# Altium PCB PCB_PDB.PcbDoc
Units mm, origin at the board's own origin, x right, y up, seen from the top; angles counter-clockwise.
Board outline 100 x 100 mm, 2 copper layers (Top Layer, Bottom Layer); 56 components, 10 nets, 150 pads, 1 vias.
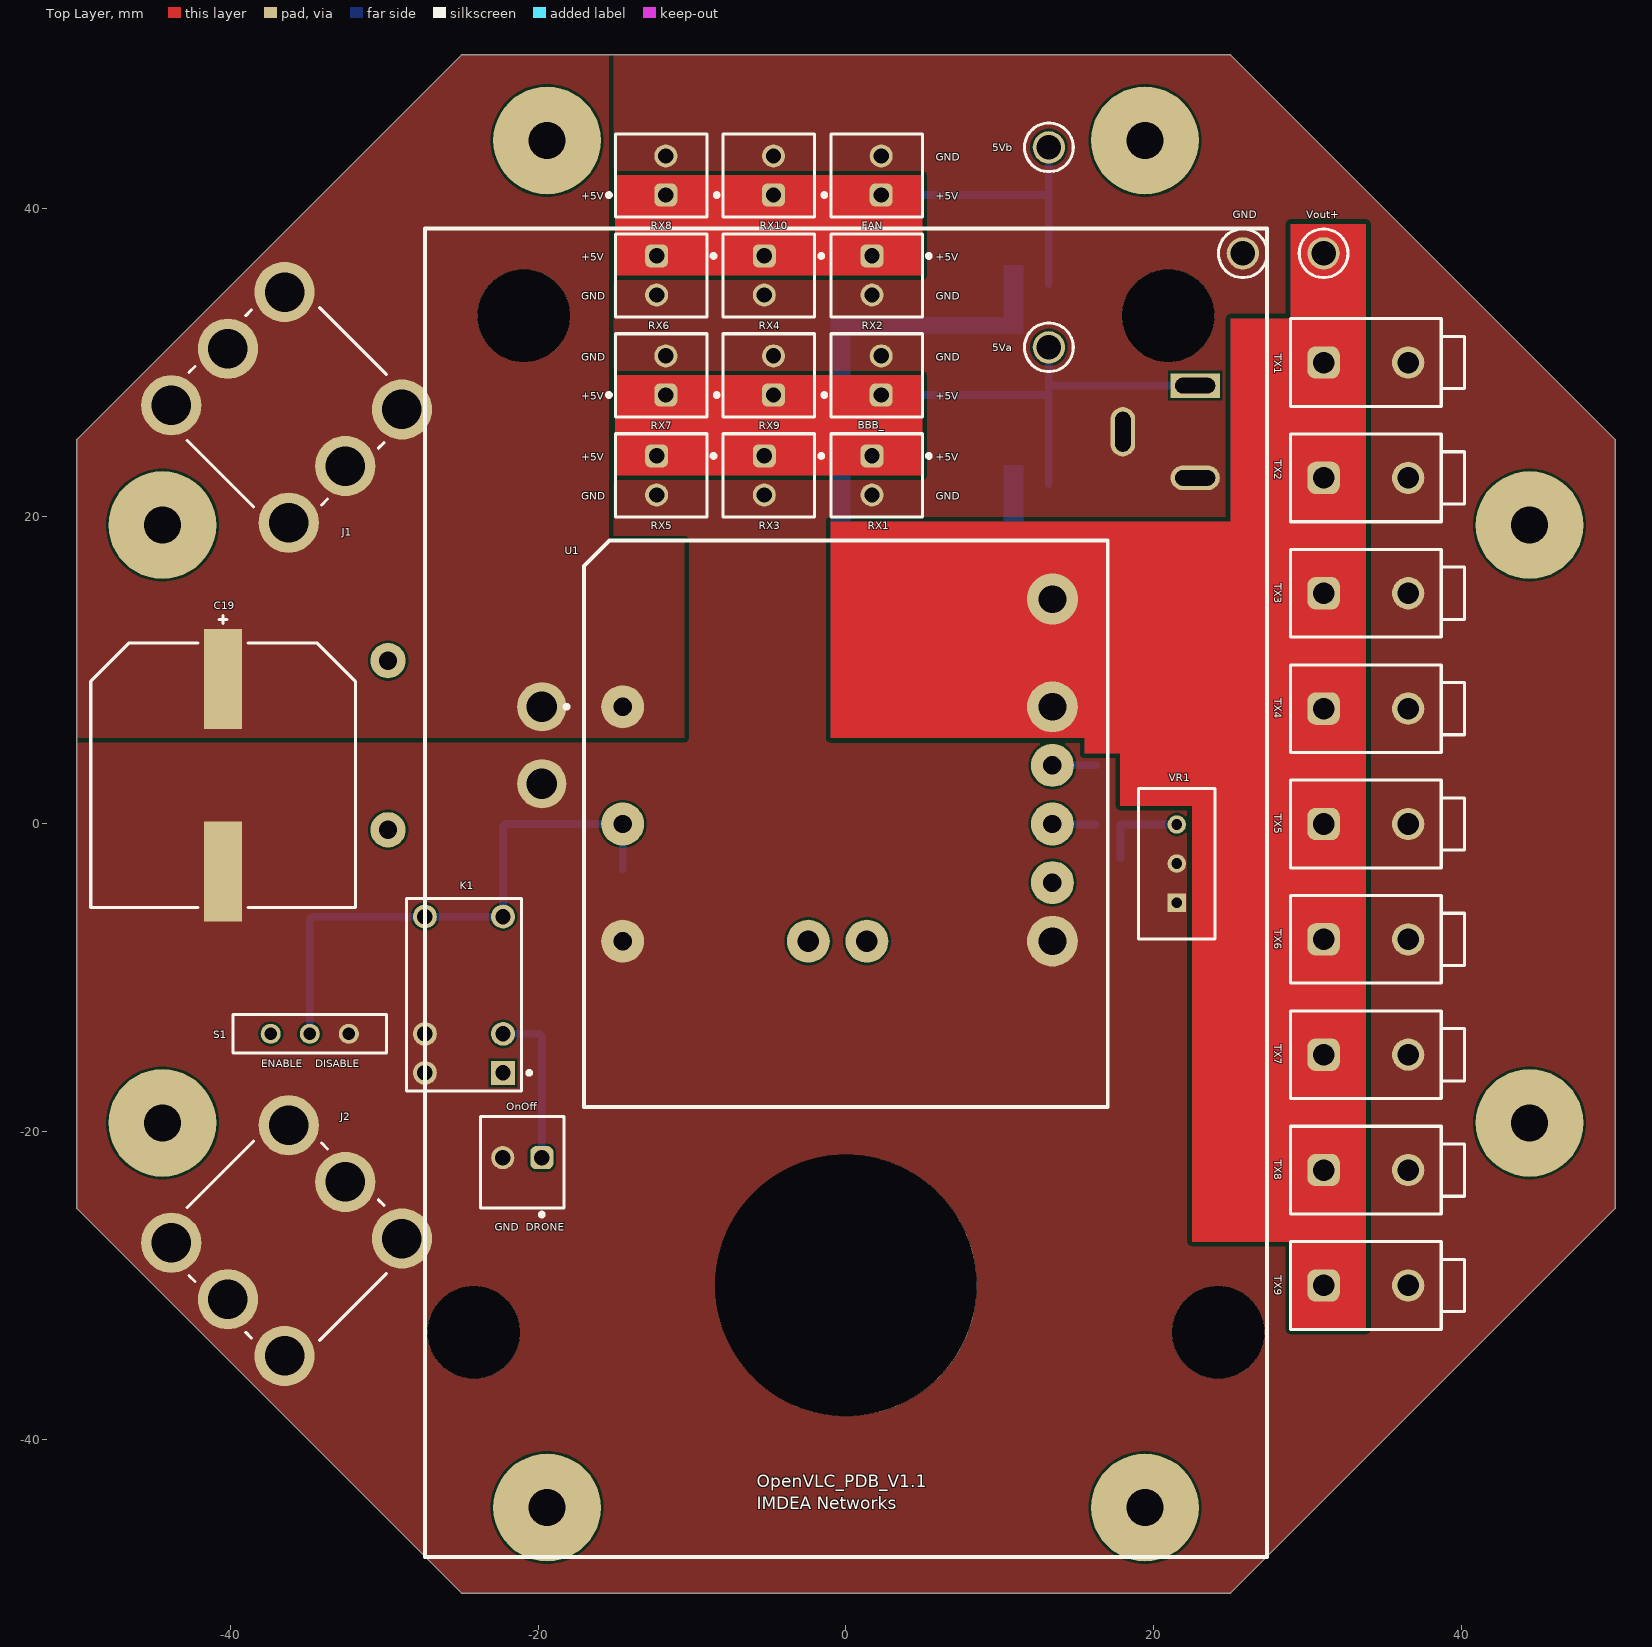
[diagram p0: Top Layer view]
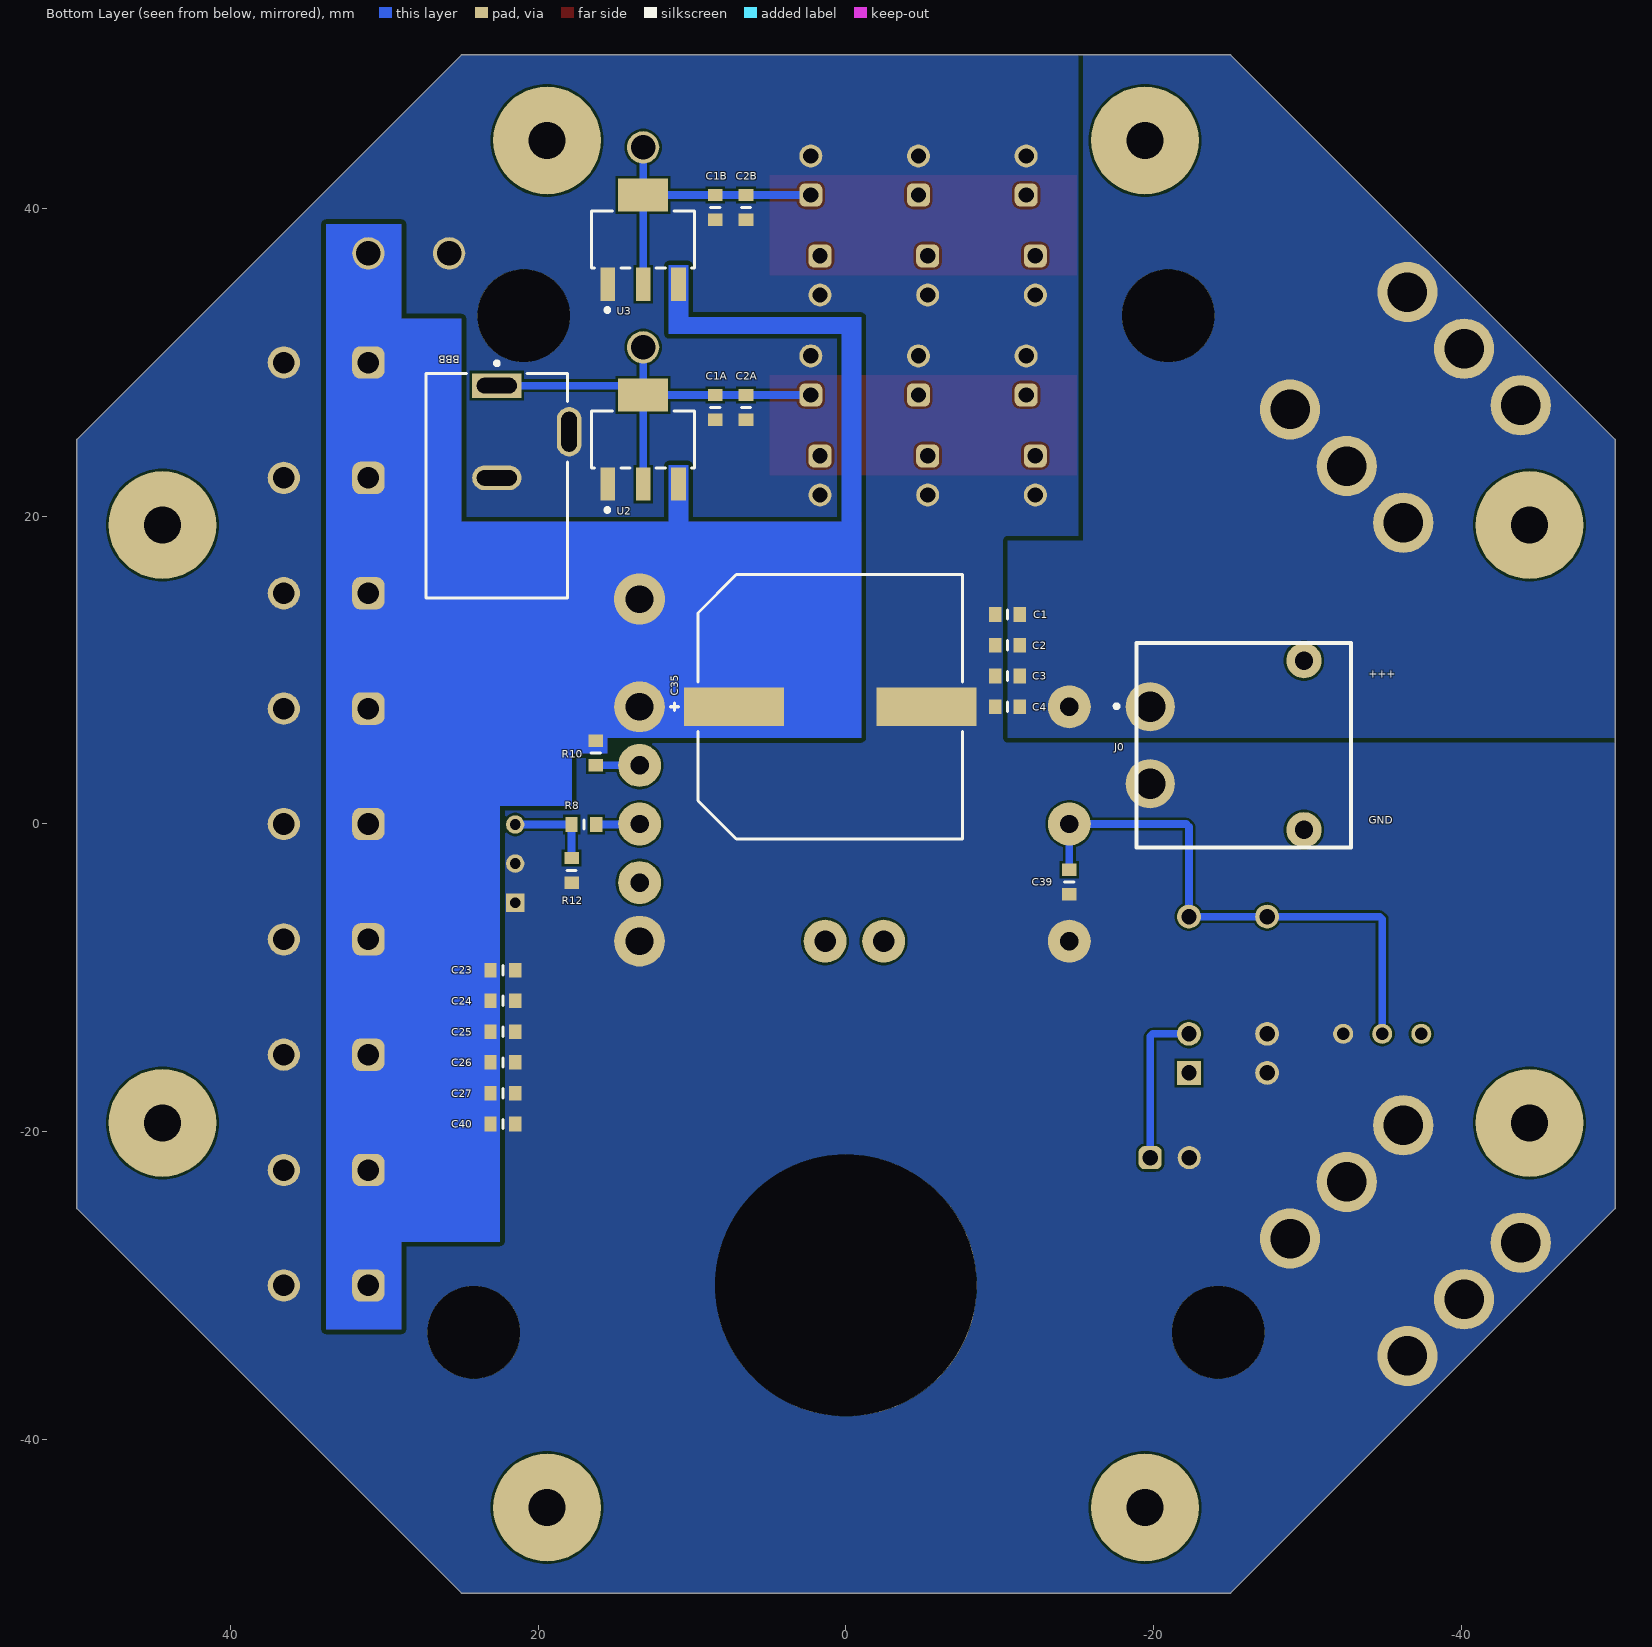
[diagram p1: Bottom Layer view, seen from below]
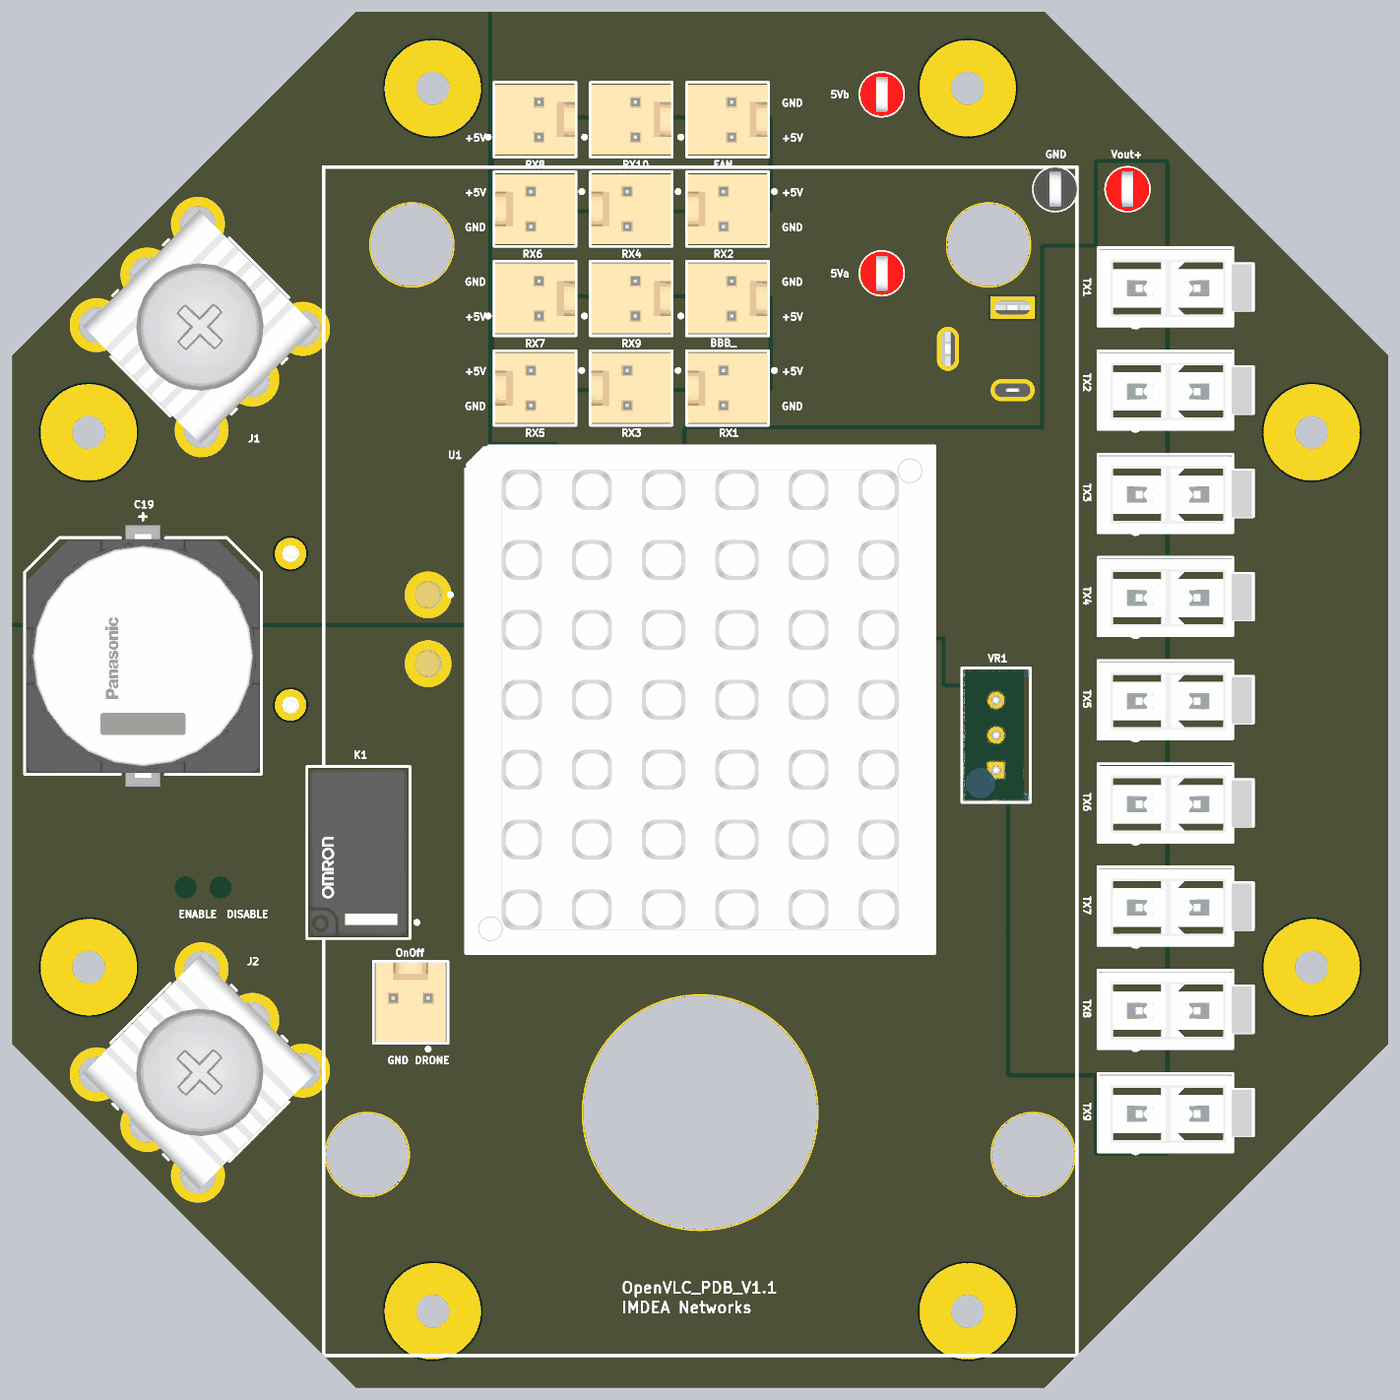
[diagram p2: 3D render of the assembled board from above, using the file's embedded part models]

## Layer stack, top to bottom
Top Solder: solder mask 0.0102, Solder Resist, Dk 3.5
Top Layer: signal copper 0.07
Dielectric1: dielectric 0.32, FR-4, Dk 4.8
Bottom Layer: signal copper 0.07
Bottom Solder: solder mask 0.0102, Solder Resist, Dk 3.5

## Board outline
-50,-25 -25,-50 25,-50 50,-25 50,25 25,50 -25,50 -50,25

## Design rules (kind name [scope] priority, off if disabled: settings)
Clearance Clearance_1 [(InNet('GND') AND InComponent('DC-DC'))] p1: gap=0.5 ignorepadtopadclearanceinfootprint=FALSE except(0: Arc-Hole Track-Hole SMDPad-Hole THPad-Hole Via-Hole Fill-Hole Poly-Hole Region-Hole Text-Hole)
Clearance [All] p2: gap=0.15 ignorepadtopadclearanceinfootprint=FALSE except(0: Arc-Hole Track-Hole SMDPad-Hole THPad-Hole Via-Hole Fill-Hole Poly-Hole Region-Hole Text-Hole; 0.3: Fill-Fill Fill-Poly Fill-Region Poly-Poly Poly-Region Region-Region)
DiffPairsRouting [All] p1: maxlimit=0.3 minlimit=0.3 mostfreqgap=0.3 toplayer_minwidth=0.381 toplayer_maxwidth=0.381 toplayer_prefwidth=0.381 bottomlayer_minwidth=0.381 bottomlayer_maxwidth=0.381 bottomlayer_prefwidth=0.381 maxuncoupledlength=12.7
Height [All] p1: minheight=0 maxheight=40 prefheight=12.7
HoleSize [All] p1: absolutevalues=TRUE maxlimit=2.54 minlimit=0.25 maxpercent=80.000 minpercent=20.000
MinimumSolderMaskSliver [All] p1: minsoldermaskwidth=0.15
PlaneClearance [All] p1: clearance=0.5
PlaneConnect [All] p1: planeconnectstyle=Direct reliefexpansion=0.508 reliefentries=4 reliefconductorwidth=0.254 reliefairgap=0.254
PolygonConnect PolygonConnect_1 [IsVia & InNet('GND')] p1: connectstyle=Direct reliefconductorwidth=0.254 reliefentries=4 polygonreliefangle="90 Angle" airgapwidth=0
PolygonConnect [All] p2: connectstyle=Direct reliefconductorwidth=0.254 reliefentries=4 polygonreliefangle="90 Angle" airgapwidth=0.254
RoutingVias [All] p1: holewidth=0.711 width=1.27 viastyle="Through Hole" minholewidth=25 minwidth=0.55 maxholewidth=0.711 maxwidth=1.27
SMDNeckDown [All] p1: percent=80.000
SilkToSilkClearance [All] p1: silktosilkclearance=0.15
SilkToSolderMaskClearance [IsPad] p1: minsilkscreentomaskgap=0.15 clearancetoexposedcopper=TRUE
SolderMaskExpansion [All] p1: expansion=0.102 istentingtop=FALSE
SupplyNets "Schematic Supply Nets_1" [InNet('+13.8V')] p1: voltage=0.000
SupplyNets "Schematic Supply Nets" [InNet('GND')] p2: voltage=0.000
Width [All] p1: maxlimit=0.5 minlimit=0.15 preferedwidth=0.3 minimp=50.000000 maximp=50.000000 favimp=50.000000
22 further rules are at their usual default settings.

## Components (designator, comment, footprint, x,y, rotation, side; value= is the part's Value field where it differs from the comment)
5Va "5010" KSTN-5010_V 13.188,30.989 r90 top
5Vb "5010" KSTN-5010_V 13.188,43.989 r90 top
BBB "PJ-102A" FP-PJ-102A-MFG 22.7,22 r0 bottom
BBB_ "61900211121" 61900211121 1.989,29.159 r270 top
C1 "GRM188R6YA106MA73D" RESC1608X55N -10.5,13.62 r180 bottom value=10uF
C1A "GRM188R6YA106MA73D" RESC1608X55N 8.5,27.089 r90 bottom value=10uF
C1B "GRM188R6YA106MA73D" RESC1608X55N 8.5,40.089 r90 bottom value=10uF
C2 "GRM188R6YA106MA73D" RESC1608X55N -10.5,11.62 r180 bottom value=10uF
C2A "GCM188R71H104KA57J" RESC1608X55N 6.5,27.089 r270 bottom value=100nF
C2B "GCM188R71H104KA57J" RESC1608X55N 6.5,40.089 r270 bottom value=100nF
C3 "GRM188R6YA106MA73D" RESC1608X55N -10.5,9.62 r180 bottom value=10uF
C4 "GCM188R71H104KA57J" RESC1608X55N -10.5,7.62 r0 bottom value=100nF
C19 "EEE-FK1H102AV" CAP-17x17 -40.5,3.15 r0 top
C23 "GRM188R6YA106MA73D" RESC1608X55N 22.305,-9.5 r0 bottom value=10uF
C24 "GRM188R6YA106MA73D" RESC1608X55N 22.305,-11.5 r0 bottom value=10uF
C25 "GRM188R6YA106MA73D" RESC1608X55N 22.305,-13.5 r0 bottom value=10uF
C26 "GRM188R6YA106MA73D" RESC1608X55N 22.305,-15.5 r0 bottom value=10uF
C27 "GRM188R6YA106MA73D" RESC1608X55N 22.305,-17.5 r0 bottom value=10uF
C35 "EEE-FK1H102AV" CAP-17x17 1,7.62 r90 bottom
C39 "GCM188R71H104KA57J" RESC1608X55N -14.52,-3.777 r270 bottom value=100nF
C40 "GCM188R71H104KA57J" RESC1608X55N 22.305,-19.5 r0 bottom value=100nF
FAN "61900211121" 61900211121 1.989,42.159 r270 top
GND "5011" KSTN-5011_V 25.8,37.1 r90 top
J0 "XT30PW-M" XT30-Footprint-1 -25.849,5.12 r270 bottom
J1 "8196" FP-8196-MFG -36.365,27.085 r45 top
J2 "8196" FP-8196-MFG -36.365,-27.085 r135 top
K1 "G5V-13 DC5" FP-G5V-13_DC5-MFG -24.835,-11.1 r90 top
OnOff "61900211121" 61900211121 -21.044,-21.991 r0 top
R8 "RN73R1JTTD53R0B25" RESC1608X55N 17.041,-0.034 r0 bottom value=53
R10 "RMCF0603ZT0R00" RESC1608X55N 16.27,4.61 r270 bottom value=0
R12 "RK73H1JTTD2001D" RESC1608X55N 17.841,-3.01 r90 bottom value=2k
RX1 "61900211121" 61900211121 1.989,22.659 r90 top
RX2 "61900211121" 61900211121 1.989,35.659 r90 top
RX3 "61900211121" 61900211121 -5.011,22.659 r90 top
RX4 "61900211121" 61900211121 -5.011,35.659 r90 top
RX5 "61900211121" 61900211121 -12.011,22.659 r90 top
RX6 "61900211121" 61900211121 -12.011,35.659 r90 top
RX7 "61900211121" 61900211121 -12.011,29.159 r270 top
RX8 "61900211121" 61900211121 -12.011,42.159 r270 top
RX9 "61900211121" 61900211121 -5.011,29.159 r270 top
RX10 "61900211121" 61900211121 -5.011,42.159 r270 top
S1 "450301014042" 450301014042 -1304.859,-1283.64 r180 top
TX1 "64900221122" 64900221122 33.8,30 r270 top
TX2 "64900221122" 64900221122 33.8,22.5 r270 top
TX3 "64900221122" 64900221122 33.8,15 r270 top
TX4 "64900221122" 64900221122 33.8,7.5 r270 top
TX5 "64900221122" 64900221122 33.8,0 r270 top
TX6 "64900221122" 64900221122 33.8,-7.5 r270 top
TX7 "64900221122" 64900221122 33.8,-15 r270 top
TX8 "64900221122" 64900221122 33.8,-22.5 r270 top
TX9 "64900221122" 64900221122 33.8,-30 r270 top
U1 "iC7" "New footprint 1" 0,0 r0 top
U2 "TLV76150DCYR" FP-DCY0004A-MFG 13.188,24.989 r90 bottom
U3 "TLV76150DCYR" FP-DCY0004A-MFG 13.188,37.989 r90 bottom
Vout+ "5010" KSTN-5010_V 31.05,37.1 r90 top
VR1 "3296W-1-503LF" FP-3296W-MFG 21.5,-2.574 r0 top

## Footprints (in the part's own frame and the unit in brackets; to place one, negate y for a bottom-side part, rotate by r counter-clockwise, add the part's x,y. Pads: shape width x height; smd on the part's side, far side on the other; paste and mask are expansions set on the pad)
61900211121 [mm] "2.54mm Male Locking Header, 2p"
  rrect50% 1.5x1.5 hole 1: 1(1.27,0.3)
  round 1.5 hole 1: 2(-1.27,0.3)
  silkscreen extent -2.71,-3.52 2.71,2.98, body extent -2.54,-2.9 2.54,2.9, height 11.53
64900221122 [mm] "4.20mm Male Dual Row Vertical Header, 2p"
  rrect50% 2.1x2.1 hole 1.4: 1(0,-2.75)
  round 2.1 hole 1.4: 2(0,2.75)
  silkscreen extent -2.85,-4.9 2.85,6.4, body extent -2.7,-4.8 3.1,6.3, height 12.85
450301014042 [mm] "THT Mini Slide Switch, body 10x2.5mm"
  round 1.3 hole 0.8: COM(-1270,-1270) L1(-1267.46,-1270) L2(-1272.54,-1270)
  silkscreen extent -1275,-1271.25 -1265,-1268.75, body extent -1275,-1271.25 -1265,-1268.75, height 6.43
CAP-17x17 [mm]
  rect 2.5x6.5 smd paste+0 mask+0: 1(0,6.277) 2(0,-6.223)
  silkscreen extent -8.6,-8.57 8.6,10.4, body extent -8.5,-8.82 8.5,8.88, height 17
FP-3296W-MFG [mm]
  rect 1.2x1.2 hole 0.7 paste-2539.97 mask+0: 1(0.005,-2.54)
  round 1.2 hole 0.7 paste-2539.97 mask+0: 2(0.005,0) 3(0.005,2.54)
  silkscreen extent -2.48,-4.89 2.48,4.89, body extent -2.58,-4.99 2.58,4.99, height 0.25
FP-8196-MFG [mm]
  round 3.92 hole 2.57 paste-2539.97 mask+0: 1(-5.207,5.398) 1(-5.207,-5.398) 1(0,5.398) 1(0,-5.398) 1(5.207,5.398) 1(5.207,-5.398)
  silkscreen extent -6.1,-6.1 6.1,6.1, body extent -7.27,-7.46 7.27,7.46, height 0.25
FP-DCY0004A-MFG [mm]
  rect 2.15x0.95 smd paste+0 mask+0: 1(-2.9,2.3) 2(-2.9,0) 3(-2.9,-2.3)
  rect 2.15x3.25 smd paste+0 mask+0: 4(2.9,0)
  silkscreen extent -4.7,-3.35 1.85,3.35, body extent -3.5,-3.25 3.5,3.25, height 1.8
FP-G5V-13_DC5-MFG [mm]
  rect 1.55x1.55 hole 1 paste-2539.97 mask+0: 1(-5.08,-2.54)
  round 1.55 hole 1 paste-2539.97 mask+0: 2(-2.54,-2.54) 5(5.08,-2.54) 6(5.08,2.54) 9(-2.54,2.54) 10(-5.08,2.54)
  silkscreen extent -6.25,-4.37 6.25,3.75, body extent -6.35,-3.85 6.35,3.85, height 0.25
FP-PJ-102A-MFG [mm]
  rect 3.2x1.6 hole 1 slot 2.6 at 0 deg paste-2539.97 mask+0: 1(0,-6.5)
  rrect100% 3.2x1.6 hole 1 slot 2.6 at 0 deg paste-2539.97 mask+0: 2(0,-0.5)
  rrect100% 1.6x3.2 hole 2.6 slot 1 at 0 deg paste-2539.97 mask+0: 3(-4.7,-3.5)
  silkscreen extent -4.6,-8.07 4.6,7.3, body extent -4.9,-7.2 4.5,7.2, height 11.2
KSTN-5010_V [mm] "Test Point, Dia 3.17mm"
  round 2.1 hole 1.6: 1(0,0)
  silkscreen extent -1.58,-1.59 1.58,1.59, body extent -1.59,-1.59 1.59,1.59, height 8.13
KSTN-5011_V [mm] "Test Point, Dia 3.17mm"
  round 2.1 hole 1.6: 1(0,0)
  silkscreen extent -1.58,-1.59 1.58,1.59, body extent -1.59,-1.59 1.59,1.59, height 8.13
"New footprint 1" [mil]
  round 110 hole 47.24: 1(-571.65,300) 2(-571.65,0) 3(-571.65,-300) 5(528.35,-150) 6(528.35,0) 7(528.35,150)
  round 130 hole 70.87: 4(528.35,-300) 8(528.35,300)
  round 110 hole 55: 9(-96.46,-300) 10(53.54,-300)
  silkscreen extent -720,-725 670,725, body extent -670,-725 670,725, height 1056
RESC1608X55N [mm]
  rect 0.8x0.95 smd: 1(-0.8,0) 2(0.8,0)
  silkscreen extent 0,-0.3 0,0.3
XT30-Footprint-1 [mm]
  round 3.2 hole 2: 1(-2.5,-6.075) 2(2.5,-6.075)
  round 2.3 hole 1.2: 3(5.5,3.925) 4(-5.5,3.925)
  silkscreen extent -6.65,-8.38 6.65,6.98, body extent -6.65,-6.98 6.65,6.98, height 5.5

## Part data
5Va 5Vb Vout+: library part CMP-1672-00002-4, "Test Point, Red, Through Hole, RoHS, Bulk", Colour=Red, Manufacturer=Keystone, Package Quantity=100, ComponentLink1Description="Manufacturer URL", ComponentLink1URL=http://www.keyelco.com/, ComponentLink2Description=Datasheet, ComponentLink2URL=http://www.keyelco.com/product-pdf.cfm?p=1319, Contact Material=Bronze, Contact Plating=Silver, DatasheetVersion="Rev. F, 12/2013", Height="8.12 mm", Mount="Through Hole", Mounting Technology="Through Hole", PackageDescription="1-Pin Through Hole Device, Dia 3.17 mm", PackageReference=5010, Packaging=Bulk, Pins=1, REACH SVHC="No SVHC", RoHSCompliant=true
BBB: library part CMP-12637-106234071-1, "PJ-102A 2.0 x 6.5 mm, 2.5 A, Horizontal, Through Hole, Tapered Pins, Dc Power Jack Connector", Color=Black, Current Rating=2.5A, Flammability Rating="UL94 V-0", Insulation Resistance=50MΩ, Max Operating Temperature=85°C, Min Operating Temperature=-25°C, Voltage Rating=24V, Contact Gender=Male, Contact Material="Copper, Nickel, Tin", Contact Plating=Nickel, Diameter=2.1mm, Gender=Male, Height=11.2mm, Housing Color=Black, Housing Material=Thermoplastic, Inside Diameter=2mm, Lead Free="Lead Free", Lifecycle Status=Production, Mount="Through Hole", NexarPartId=106234071, Number of Conductors=2, Number of Contacts=3, Orientation=Horizontal, Outside Diameter=6.5mm, Packaging=Bulk, RoHS=Compliant, Schedule B="8536695050, 8536695050", Shielding=No, Termination="Through Hole", Voltage Rating (DC)=24V
BBB_ FAN OnOff RX1 RX2 RX3 RX4 RX5 RX6 RX7 RX8 RX9 RX10: library part CMP-1502-00584-3, Color=Beige, Contact Resistance=20mΩ, Current Rating=3A, Flammability Rating="UL94 V-0", Insulation Resistance=1GΩ, Max Operating Temperature=105°C, Min Operating Temperature=-40°C, Operating Supply Voltage=250V, Connector Type="Male Pin", Contact Gender=Male, Contact Material=Copper, Contact Mating Length=7.493mm, Contact Plating=Tin, Fastening Type=Friction, Gender=Male, Height=11.75mm, Housing Material=Nylon, Lead Pitch=2.54mm, Length=5.08mm, Mount="Through Hole", NexarPartId=18818218, Number of Contacts=2, Number of Pins=2, Number of Positions=2, Number of Rows=1, Orientation=Vertical, Packaging=Bulk, Pitch=2.54mm, REACH SVHC=Unknown, RoHS=Compliant, Termination="Through Hole", Voltage Rating=250V, Width=5.12mm
C1 C1A C1B C2 C2A C2B C3 C4 C23 C24 C25 C26 C27 C39 C40: library part Cap, "Capacitor", LatestRevisionDate=17-Jul-2002, LatestRevisionNote="Re-released for DXP Platform.", PackageDescription="Radial Cap, Thru-Hole; 2 Leads; 0.3 in Pin Spacing", PackageReference=RAD-0.3, Published=8-Jun-2000, Publisher="Altium Limited"
C19 C35: library part CMP-001-00083-1, "CAP-17x17"
GND: library part CMP-1672-00003-4, "Test Point, Black, Through Hole, RoHS, Bulk", Colour=Black, Manufacturer=Keystone, Package Quantity=100, ComponentLink1Description="Manufacturer URL", ComponentLink1URL=http://www.keyelco.com/, ComponentLink2Description=Datasheet, ComponentLink2URL=http://www.keyelco.com/product-pdf.cfm?p=1320, Contact Material=Bronze, Contact Plating=Silver, DatasheetVersion="Rev. F, 12/2013", Height="8.12 mm", Mount="Through Hole", Mounting Technology="Through Hole", PackageDescription="1-Pin Through Hole Device, Dia 3.17 mm", PackageReference=5011, Packaging=Bulk, Pins=1, REACH SVHC="No SVHC", RoHSCompliant=true
J0: library part CMP-00002-1
J1 J2: library part CMP-00214-00036902-2, "8196 PC Screw Terminal 0.67 in. L Brass Tin Plate Stainless Steel Mounting Hole 0.045 in. T", Current Rating=30A, Connector Type="PCB, Terminal Block", Contact Material=Brass, Contact Plating=Tin, Depth=11.93mm, Gender=Female, Height=11.7602mm, Insulation=Non-Insulated, Lead Free="Lead Free", Length=11.93mm, Material=Brass, Max Current Rating=30A, Mount="Snap in, Through Hole", NexarPartId=36902, Number of Contacts=6, Number of Pins=6, Number of Ports=1, Number of Rows=2, Number of Terminals=6, Orientation=Straight, Packaging=Bulk, REACH SVHC="No SVHC", RoHS=Compliant, Terminal Material=Brass, Termination=Screw, Wire Gauge (Max)=12AWG, Wire Gauge (Min)=22AWG
K1: library part CMP-08823-000054-1, "RELAY GEN PURPOSE SPDT 1A 5VDC", Coil Current=30mA, Coil Power=150mW, Coil Resistance=167R, Coil Voltage (DC)=5V, Contact Current Rating=1A, Max Operating Temperature=70°C, Min Operating Temperature=-40°C, Package Quantity=25, Coil Type=Non-Latching, Contact Material=Gold, Mount="Through Hole", Operate Time=5ms, Packaging=Rail/Tube, Power Consumption=150mW, Relay Type="General Purpose", Release Time=5ms, Series=G5V-1, Termination="PC Pin", Throw Configuration=SPDT
R8 R10 R12: library part Res1, "Resistor", LatestRevisionDate=17-Jul-2002, LatestRevisionNote="Re-released for DXP Platform.", PackageDescription="Axial Device, Thru-Hole; 2 Leads; 0.3 in Pin Spacing", PackageReference=AXIAL-0.3, Published=8-Jun-2000, Publisher="Altium Limited"
S1: library part CMP-1466-00001-2, Color=Grey, Contact Current Rating=500mA, Contact Resistance=30mΩ, Insulation Resistance=10GΩ, Max Operating Temperature=85°C, Min Operating Temperature=-40°C, Voltage Rating=12V, Actuator Length=1.4mm, Actuator Material="Nylon, Polyamide", Contact Material=Gold, Contact Plating=Gold, Current Rating=500mA, Electrical Life=2kcycles, Height=5.9mm, Lead Free="Lead Free", Length=8.42mm, Life (Cycles)=2kcycles, Mechanical Life=2kcycles, Mount="Through Hole", NexarPartId=23825802, Orientation=Vertical, Packaging=Bulk, REACH SVHC="No SVHC", RoHS=Compliant, Switch Function=On-On, Switch Travel=1.6mm, Termination="PC Pin", Throw Configuration=SPDT, Voltage Rating (DC)=12V, Width=2.5mm
TX1 TX2 TX3 TX4 TX5 TX6 TX7 TX8 TX9: library part CMP-1502-00493-2, Color=White, Contact Resistance=10mΩ, Current Rating=9A, Flammability Rating="UL94 V-0", Insulation Resistance=1GΩ, Max Operating Temperature=105°C, Min Operating Temperature=-40°C, Operating Supply Voltage=600V, Connector Type="Male Pin, Socket", Contact Gender=Male, Contact Material=Copper, Contact Plating=Tin, Fastening Type=Ramp, Gender=Male, Height=12.8mm, Housing Material=Nylon, Lead Length=3.5mm, Lead Pitch=4.2mm, Length=5.4mm, Mount="Through Hole", NexarPartId=8917578, Number of Contacts=2, Number of Pins=2, Number of Positions=2, Number of Rows=2, Orientation=Vertical, Pitch=4.2mm, REACH SVHC=Unknown, RoHS=Compliant, Row Spacing=5.5118mm, Termination=Solder, Voltage Rating=600V, Width=5.5mm
U1: library part CMP-00000-3, "DC-DC Converters, PCB mount type, Output: 300W, wide range (8 to 24V), Non-Isolated Step-up/Step-down"
U2 U3: library part CMP-00370-134324849-1, "TLV76150DCYR 1-A 16-V high-PSRR linear voltage regulator 4-SOT-223 -40 to 125", Case/Package=SOT-223, Dropout Voltage=900mV, Manufacturer Lifecycle Status=ACTIVE, Max Junction Temperature (Tj)=125°C, Max Supply Voltage=16V, Min Operating Temperature=-40°C, Min Supply Voltage=6.5V, Nominal Supply Current=65µA, Output Current=1A, Output Voltage=5V, Accuracy=1%, Height=1.8mm, Length=6.5mm, Lifecycle Status=Production, Max Operating Temperature=125°C, NexarPartId=134324849, Number of Channels=1, Number of Outputs=1, Number of Pins=4, Thickness=1.6mm, Width=3.5mm
VR1: library part CMP-07234-000043-1, "TRIMMER 50K OHM 0.5W PC PIN TOP", Color=Blue, Insulation Resistance=1GR, Manufacturer Series=3296, Max Operating Temperature=125°C, Max Power Dissipation=500mW, Min Operating Temperature=-55°C, Package Quantity=50, Resistance=50kR, Resistance Law=Linear, Resistance Tolerance=10%, Resistor Type=Cermet, Temperature Coefficient=100ppm/°C, Actuator Orientation=Vertical, Actuator Type=SCREW, Contact Plating=Tin, Depth=4.83mm, Height=0.395inch, Lead Free="Lead Free", Length=9.53mm, Military Standard=Not, Mount=Panel, Number of Pins=3, Number of Terminals/Pins=3, Number of Turns=25, Packaging=Rail/Tube, Power Rating=500mW, Radiation Hardening=No, REACH SVHC="No SVHC", RoHS Compliant=Yes, Series=3296, Taper=Linear, Technology=CERMET, Terminal Finish=Tin, Termination=Pin, Tolerance=10%, Type=Potentiometer, Weight=0.03oz, Width=9.53mm

## Free pads (board coordinates)
  round 7 hole 2.4: H(-44.435,-19.435) H(-44.435,19.435) H(-19.435,44.435) H(-19.435,-44.435) H(19.435,-44.435) H(19.435,44.435) H(44.435,-19.435) H(44.435,19.435)
  round 6 hole 6 unplated: H(-24.195,-33.05) H(-20.955,33.05) H(20.955,33.05) H(24.195,-33.05)
  round 17 hole 17 unplated: H(0,-30)

## Via types
v1: diameter 3.302, hole 1.8, Top Layer to Bottom Layer, 1 vias

## Nets (pads, with @x,y where several pads share a name; then routed paths per layer and width w, separated by ;. In a path a pad name is that pad's centre, name@x,y a point inside that pad or via, vN(x,y) a via of type N, cw(c..) or ccw(c..) an arc to the next point about the centre after c; other vN are vias at no path point)
+13.8V: C23.2 C24.2 C25.2 C26.2 C27.2 C35.1 C40.2 R10.1 TX1.1 TX2.1 TX3.1 TX4.1 TX5.1 TX6.1 TX7.1 TX8.1 TX9.1 U1.8 U2.3 U3.3 Vout+.1 | length 5
  Bottom Layer w0.3: U1.8 16.095,7.62 16.27,7.444 R10.1
  other v1: 13.42,14.62
GND: BBB.2 BBB.3 BBB_.2 C1.1 C1A.1 C1B.1 C2.1 C2A.2 C2B.2 C3.1 C4.2 C19.2 C23.1 C24.1 C25.1 C26.1 C27.1 C35.2 C39.2 C40.1 FAN.2 GND.1 J0.2 J2.1 K1.9 K1.10 OnOff.2 R12.1 RX1.2 RX2.2 RX3.2 RX4.2 RX5.2 RX6.2 RX7.2 RX8.2 RX9.2 RX10.2 S1.L2 TX1.2 TX2.2 TX3.2 TX4.2 TX5.2 TX6.2 TX7.2 TX8.2 TX9.2 U1.3 U1.4 U2.1 U3.1 VR1.1 VR1.2
Net5Va_1: 5Va.1 BBB.1 BBB_.1 C1A.2 C2A.1 RX1.1 RX3.1 RX5.1 RX7.1 RX9.1 U2.2 U2.4 | length 31.7
  Bottom Layer w0.5: BBB_.1 U2.4 ; U2.2 U2.4 ; 5Va.1@13.188,30.889 U2.4 ; 5Va.1 13.188,28.676 13.364,28.5 BBB.1@22.8,28.5
Net5Vb_1: 5Vb.1 C1B.2 C2B.1 FAN.1 RX2.1 RX4.1 RX6.1 RX8.1 RX10.1 U3.2 U3.4 | length 19.7
  Bottom Layer w0.5: FAN.1 C1B.2 U3.4 ; U3.2 U3.4 ; 5Vb.1@13.188,43.889 U3.4
NetC1_2: C1.2 C2.2 C3.2 C4.1 C19.1 J0.1 J1.1 U1.1
NetC39_1: C39.1 K1.5 K1.6 S1.COM U1.2 | length 36.8
  Bottom Layer w0.5: S1.COM -34.859,-6.196 -34.684,-6.02 K1.5 -22.295,-0.176 -22.119,0 U1.2 C39.1
NetK1_2: K1.2 OnOff.1 | length 10.5
  Bottom Layer w0.5: K1.2 -19.95,-13.64 -19.774,-13.816 OnOff.1
NetR8_1: R8.1 U1.6 | length 2.8
  Bottom Layer w0.3: U1.6 U1.6@13.454,-0.034
  Bottom Layer w0.5: U1.6@13.454,-0.034 R8.1
NetR8_2: R8.2 R12.2 VR1.3 | length 5.8
  Bottom Layer w0.5: R12.2 R8.2 VR1.3
NetR10_2: R10.2 U1.7 | length 2.9
  Bottom Layer w0.5: U1.7 R10.2
pads on no net: J0.3 J0.4 K1.1 S1.L1 U1.5 U1.9 U1.10

## Polygon pours and split planes (outlines as drawn)
GND on Bottom Layer "GND_L02_P029" (solid, pour order 29): -50,25 -25,50 25,50 50,25 50,-25 25,-50 -25,-50 -50,-25
NetC1_2 on Bottom Layer "NETC1_2_L02_P027" (solid, pour order 27): -10.5,5.596 -10.5,18.42 -15.411,18.42 -15.411,50 -25,50 -50,25 -50,5.596
GND on Top Layer "GND_L01_P028" (solid, pour order 28): -50,-25 -50,25 -25,50 25,50 50,25 50,-25 25,-50 -25,-50
NetC1_2 on Top Layer "NETC1_2_L01_P023" (solid, pour order 23): -50,5.596 -50,25 -25,50 -15.411,50 -15.411,18.42 -10.5,18.42 -10.5,5.596

## Other copper
Top Layer:
  region net +13.8V: 25,32.85 33.8,32.85 33.8,19.65 25,19.65
  region net +13.8V: 17.841,15.14 28.9,15.14 28.9,1.197 17.841,1.197
  region net +13.8V: 15.52,17.434 28.9,17.434 28.9,4.6 15.52,4.6
  region net +13.8V: -0.986,19.65 28.9,19.65 28.9,5.596 -0.986,5.596
  region net Net5Va_1: -14.986,29.159 4.964,29.159 4.964,22.659 -14.986,22.659
  region net Net5Vb_1: -14.986,42.159 4.964,42.159 4.964,35.659 -14.986,35.659
  region net +13.8V: 22.503,19.65 28.9,19.65 28.9,-27.15 22.503,-27.15
  region net +13.8V: 23.98,19.65 33.8,19.65 33.8,-27.15 23.98,-27.15
  region net +13.8V: 28.9,39 33.8,39 33.8,-32.85 28.9,-32.85
Bottom Layer:
  region net +13.8V: -0.986,32.949 11.513,32.949 11.513,31.869 -0.986,31.869
  region net +13.8V: 10.263,36.314 11.513,36.314 11.513,31.869 10.263,31.869
  region net +13.8V: -0.986,32.949 0.264,32.949 0.264,18.42 -0.986,18.42
  region net +13.8V: 10.263,23.314 11.513,23.314 11.513,18.42 10.263,18.42
  region net +13.8V: 25,32.85 33.8,32.85 33.8,19.65 25,19.65
  region net +13.8V: 17.841,12.688 33.8,12.688 33.8,1.197 17.841,1.197
  region net +13.8V: 15.52,18.42 33.8,18.42 33.8,4.61 15.52,4.61
  region net +13.8V: 28.9,39 33.8,39 33.8,-32.85 28.9,-32.85
  region net +13.8V: 22.503,18.42 33.8,18.42 33.8,-27.15 22.503,-27.15
  region net +13.8V: -0.986,19.65 28.9,19.65 28.9,5.596 -0.986,5.596

## Silkscreen, mask and mechanical layers (free items; w line width, h text height)
Top Overlay:
  lines w0.254: -27.375,-47.65 27.375,-47.65 27.375,38.71 -27.375,38.71 -27.375,-47.65
  text "GND" at 5.83,43.129 h0.5
  text "+5V" at -17.2,40.589 h0.5
  text "+5V" at 5.83,40.589 h0.5
  text "+5V" at -17.2,36.629 h0.5
  text "+5V" at 5.83,36.629 h0.5
  text "GND" at -17.2,34.089 h0.5
  text "GND" at 5.83,34.089 h0.5
  text "GND" at -17.2,30.129 h0.5
  text "GND" at 5.83,30.129 h0.5
  text "+5V" at -17.2,27.589 h0.5
  text "+5V" at 5.83,27.589 h0.5
  text "+5V" at -17.2,23.629 h0.5
  text "+5V" at 5.83,23.629 h0.5
  text "GND" at -17.2,21.089 h0.5
  text "GND" at 5.83,21.089 h0.5
  text "ENABLE" at -38,-15.821 h0.5
  text "DISABLE" at -34.5,-15.821 h0.5
  text "GND" at -22.824,-26.44 h0.5
  text "DRONE" at -20.826,-26.44 h0.5
  text "OpenVLC_PDB_V1.1" at -5.813,-43.105 h0.8
  text "IMDEA Networks" at -5.813,-44.537 h0.8
Bottom Overlay:
  text "+++" at -34,9.5 h0.5
  text "GND" at -34,0 h0.5
Mechanical 1:
  lines w0.254: -25,-50 -25,-50 ; -25,-50 -50,-25 -50,25 -25,50 25,50 ; -25,-50 25,-50 ; 25,-50 25,-50 ; 25,-50 50,-25 50,25 25,50 ; 25,50 25,50